# EAGLE board EmergencyStop - RevA2 (EAGLE 7.7.0)
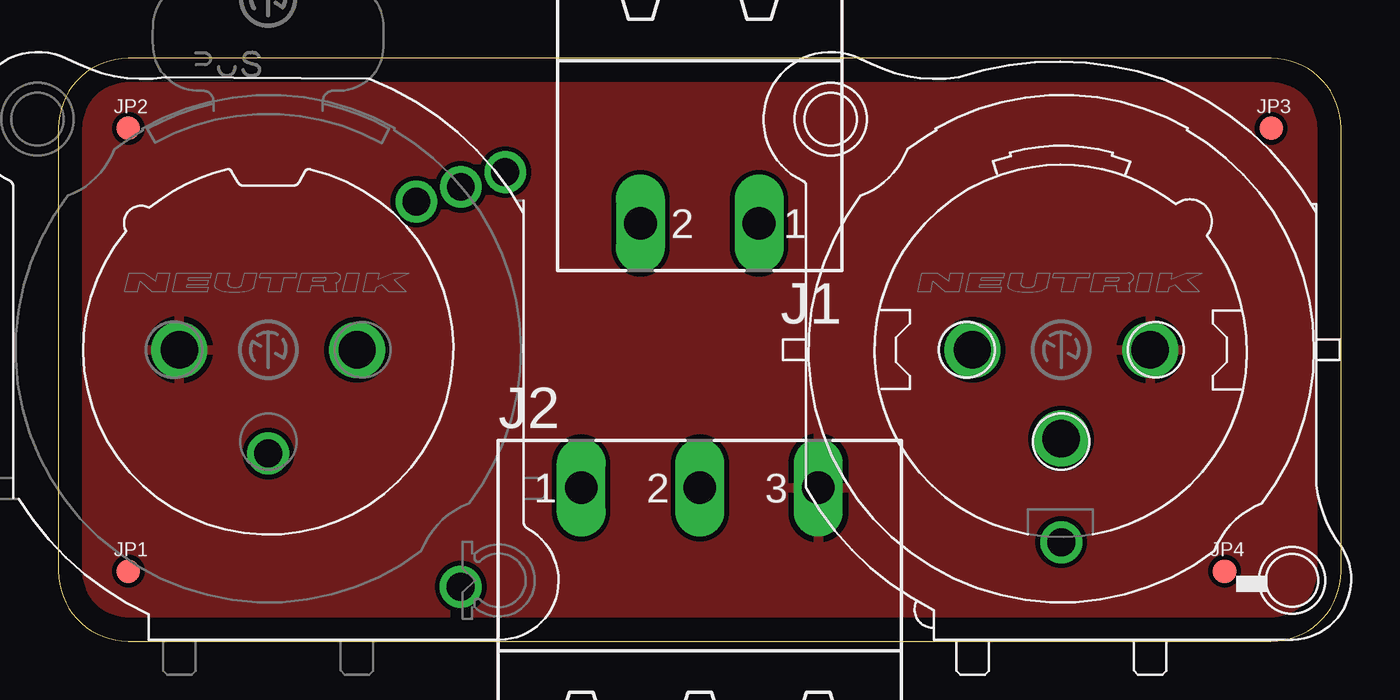
[diagram p0: board, top side]
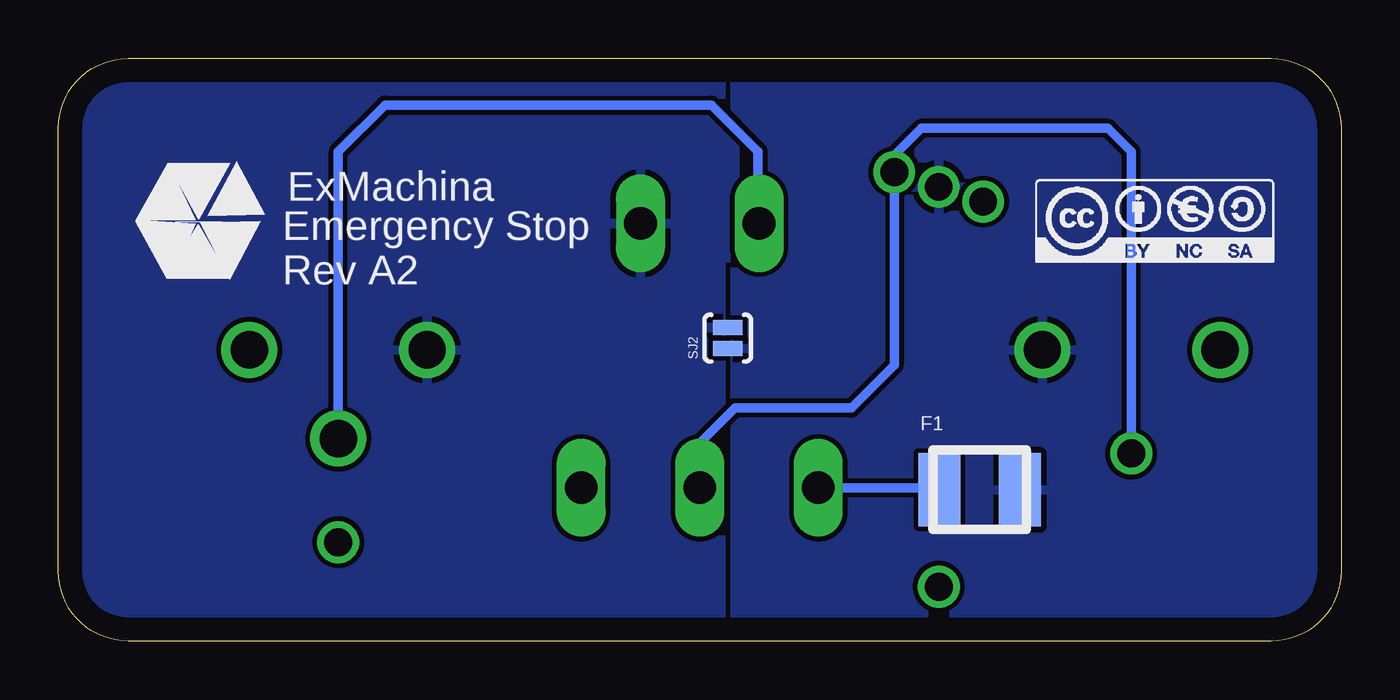
[diagram p1: board, bottom side, seen from below]

Size 55 x 25 mm. Coordinates in mm from the lower left corner, seen from the top.
Outline: 0,22 0,3 arc90 3,0 52,0 arc90 55,3 55,22 arc90 52,25 3,25 arc90 0,22
Copper layers (1*16): Top 0.035mm / dielectric 1.5mm / Bottom 0.035mm
Design rules "default": minimum track width 10mil, minimum drill 0.6mm, track to track 8mil, track to pad 8mil, pad to pad 8mil, via to via 8mil, smd to smd 8mil, copper to edge 40mil, drill to drill 8mil, minimum pad ring 10mil, minimum via ring 8mil, stop-mask expansion 4mil, vias tented up to drill 0mil, thermal gap 10mil

## Footprints (pad centres in the part's own frame; a part is rotated, then mirrored left to right if it is on the bottom)
LITTLEFUSE_SMD = smd 1.78 x 3.15: 1 -1.725,0; 2 1.725,0
MSTBA2 = drill 1.397 long: 1 -2.54,5.08; 2 2.54,5.08
MSTBA3 = drill 1.397 long: 1 -5.08,5.08; 2 0,5.08; 3 5.08,5.08
NC3FBV2-SW = drill 1.6: 1 3.81,0; 2 -3.81,0 | drill 1.2: 3 0,-4.45; G 8.25,-10.16 | drill 1.194: C 8.255,6.985; NC 6.35,6.35; NO 10.16,7.62
NC3MAV = drill 1.6: 1 -3.81,0; 2 3.81,0; 3 0,-3.81 | drill 1.2: G 0,-8.255
FIDUCIAL-1X2 = smd 1 x 1: 1 0,0
SJ_2S-NO = smd 0.635 x 1.27: 1 -0.45,0; 2 0.45,0

## Placement (x,y rotation side)
CC1  CC-BY-NC-SA  [CC-BY-NC-SA]  8,18 0 bottom
F1  1812L110/24DR  [LITTLEFUSE_SMD]  15.5,6.5 0 bottom
J1  MSTBA2  [MSTBA2]  27.5,23 180 top
J2  MSTBA3  [MSTBA3]  27.5,1.5 0 top
J3  NC3FBV2-SW  [NC3FBV2-SW]  9,12.5 0 top
J4  NC3MAV  [NC3MAV]  43,12.5 0 top
JP1  FIDUCIAL1X2  [FIDUCIAL-1X2]  3,3 0 top
JP2  FIDUCIAL1X2  [FIDUCIAL-1X2]  3,22 0 top
JP3  FIDUCIAL1X2  [FIDUCIAL-1X2]  52,22 0 top
JP4  FIDUCIAL1X2  [FIDUCIAL-1X2]  50,3 0 top
SJ2  SOLDERJUMPERNO  [SJ_2S-NO]  26.3,13 90 bottom
T1  EXMACHINA-LOGO-NAME  [EXM-LOGO-BASELINE]  49,18 0 bottom

## Library data of the parts
CC1 = cc-by-sa
F1 = fuse2
J1 = con-phoenix-508; MF: FARNELL; MPN: 1757242; OC_FARNELL: 3705171; OC_NEWARK: 71C4161
J2 = con-phoenix-508; MF: FARNELL; MPN: 1757255; OC_FARNELL: 3705183; OC_NEWARK: 71C4162
J3 = con-neutrik_ag
J4 = con-neutrik_ag; MF: FARNELL; MPN: NC3MAV; OC_FARNELL: 724531; OC_NEWARK: 46WX3058
JP1-JP4 = SparkFun
SJ2 = SparkFun-Passives
T1 = exmachina

## Nets
+24V_IN: F1.2 J3.1 J3.C SJ2.1
+24V_OUT: J1.1 J4.1 SJ2.2
GND: J2.3 J3.2 J4.2
N$1: F1.1 J2.1
SIG_IN: J2.2 J3.3 J3.NO
SIG_OUT: J1.2 J4.3

## Tracks (layer width: path | path; a pad name or v marks a point on that pad's centre or on a via)
+24V_IN
  pour Bottom: -9,31 26,31 26,-6 -9,-6
+24V_OUT
  pour Bottom (rank 2): 65,31 26,31 26,-6 65,-6
GND
  pour Top: -10,32 66,32 66,-7 -10,-7
N$1
  Bottom 0.406: F1.1 17.3,6.58 J2.1
SIG_IN
  Bottom 0.406: J3.3 9,21 10,22 18,22 19.16,20.84 J3.NO 19.16,11.84 21,10 26,10 27.5,8.5 J2.2
SIG_OUT
  Bottom 0.406: J4.3 43,21 41,23 27,23 25,21 25,17.96 J1.2

## Text on the board
bPlace: Emergency Stop / Rev A2